# Altium PCB TCS34725_PCB.PcbDoc
Units mm, origin at the board's own origin, x right, y up, seen from the top; angles counter-clockwise.
Board outline 22.5 x 38.5 mm, 2 copper layers (Top Layer, Bottom Layer), stack 1.571 mm thick; 22 components, 12 nets, 59 pads, 9 vias.
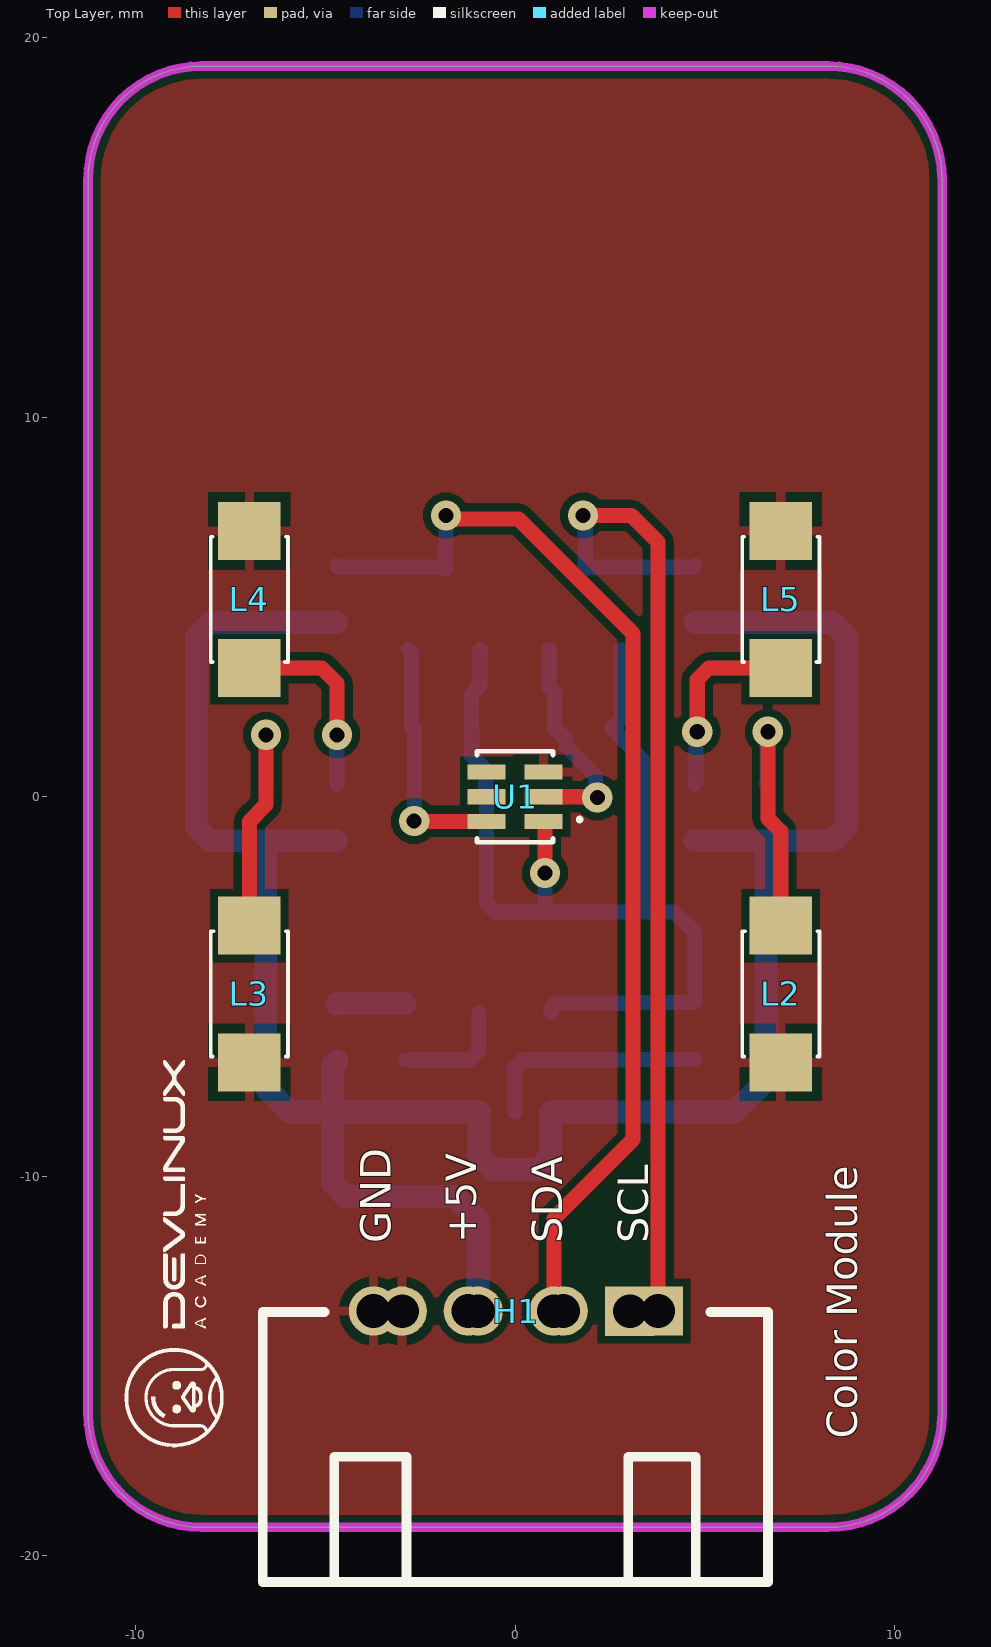
[diagram p0: Top Layer view]
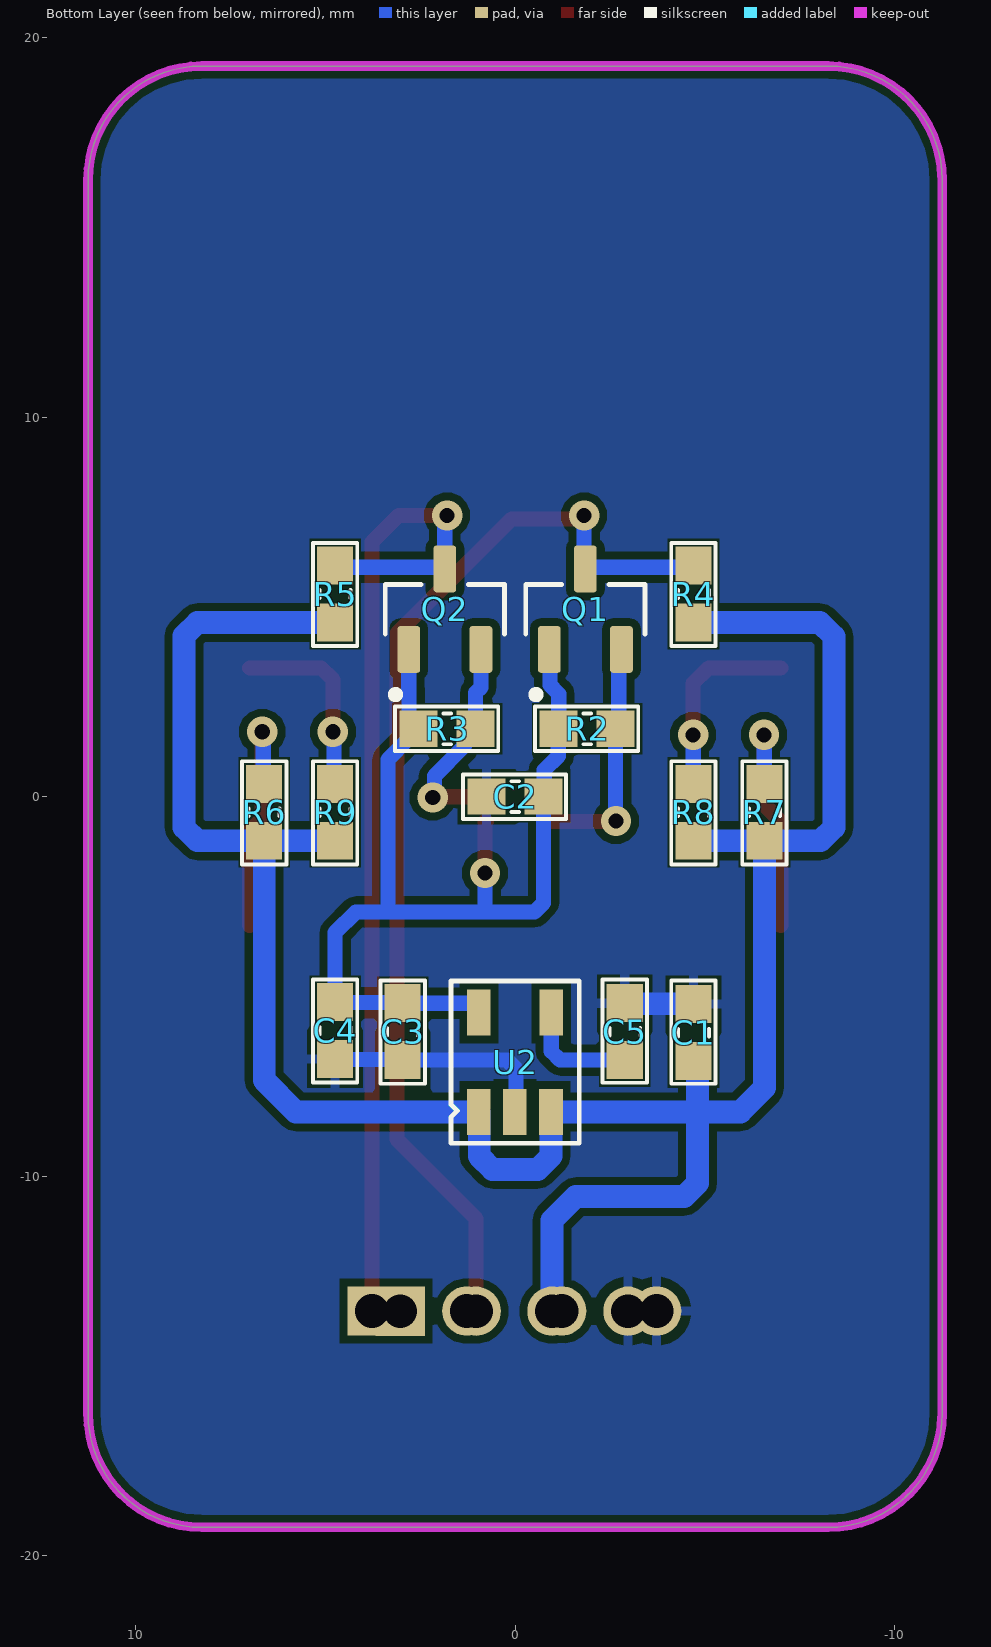
[diagram p1: Bottom Layer view, seen from below]
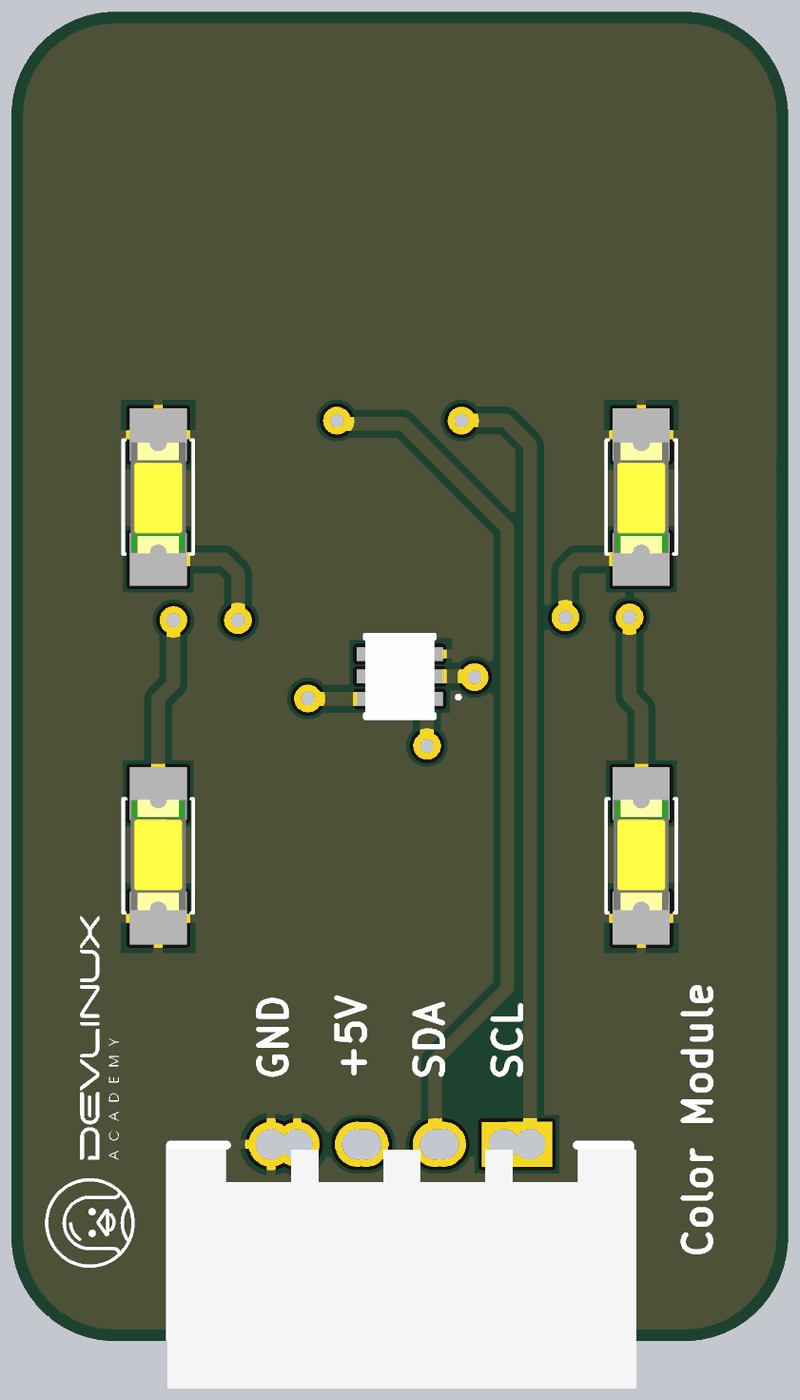
[diagram p2: 3D render of the assembled board from above, using the file's embedded part models]
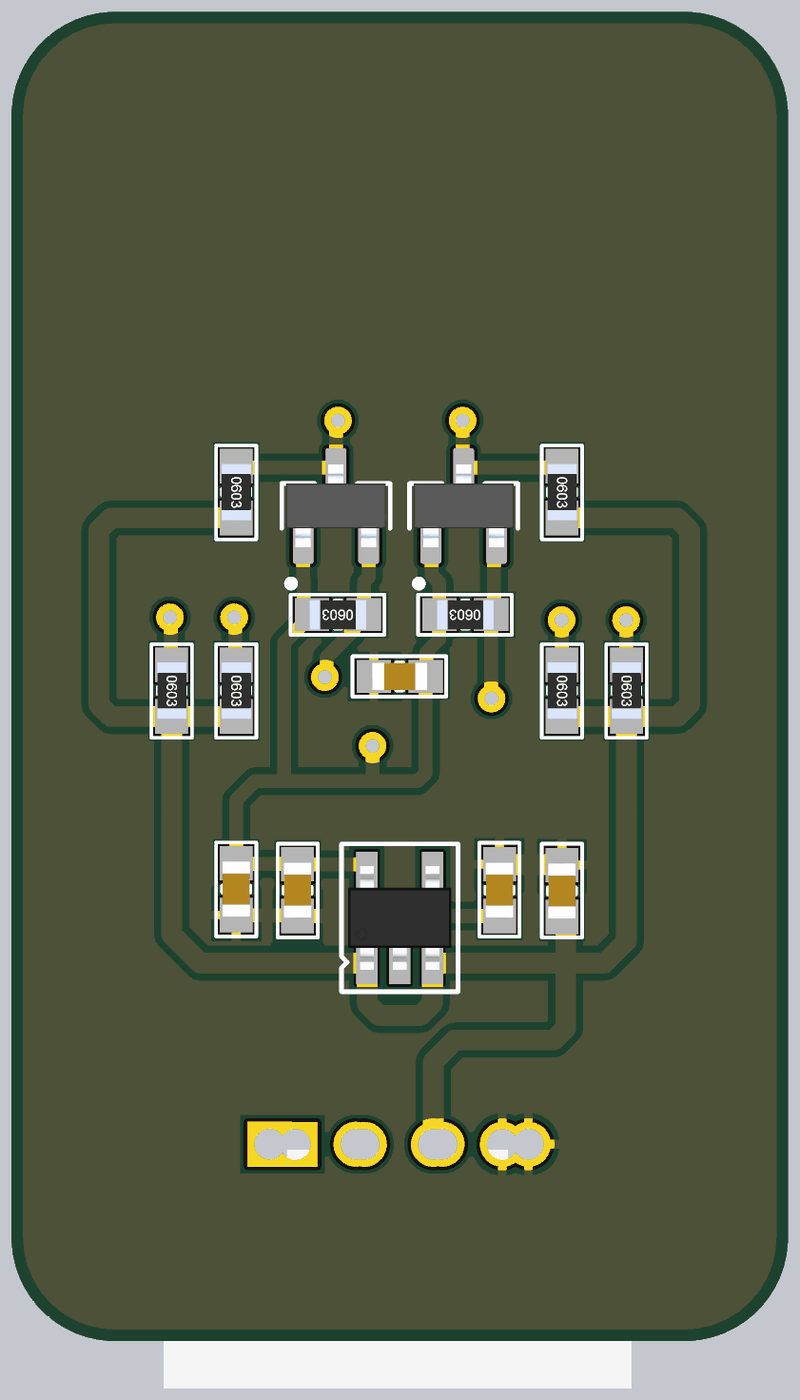
[diagram p3: 3D render of the assembled board from below, using the file's embedded part models]

## Layer stack, top to bottom
Top Solder: solder mask 0.0102, Solder Resist, Dk 3.5
Top Layer: signal copper 0.0356
Dielectric 1: dielectric 1.5, FR-4, Dk 4.8
Bottom Layer: signal copper 0.0356
Bottom Solder: solder mask 0.0102, Solder Resist, Dk 3.5

## Board outline
-11.25,-16.25 -11.25,16.25 cw(c-8.25,16.25) -8.25,19.25 8.25,19.25 cw(c8.25,16.25) 11.25,16.25 11.25,-16.25 cw(c8.25,-16.25) 8.25,-19.25 -8.25,-19.25 cw(c-8.25,-16.25)

## Design rules (kind name [scope] priority, off if disabled: settings)
Clearance [All] p1: gap=0.2 ignorepadtopadclearanceinfootprint=FALSE except(0: Arc-Hole Track-Hole SMDPad-Hole THPad-Hole Via-Hole Fill-Hole Poly-Hole Region-Hole Text-Hole)
PolygonConnect [All] p1: connectstyle=Relief reliefconductorwidth=0.254 reliefentries=4 polygonreliefangle="90 Angle" airgapwidth=0.254
RoomDefinition TCS37425_SCH [InComponentClass('TCS37425_SCH')] p1: confinementstyle=ConfineIn formatcopy=TRUE lockcomponents=FALSE outline -48.541,-51.758 62.965,-51.758 62.965,-35.248 -48.541,-35.248
RoutingVias [All] p1: holewidth=0.4 width=0.8 viastyle="Through Hole" minholewidth=0.3 minwidth=0.6 maxholewidth=0.5 maxwidth=1
SolderMaskExpansion [All] p1: expansion=0.102 istentingtop=FALSE
Width [All] p1: maxlimit=0.6 minlimit=0.254 preferedwidth=0.4
30 further rules are at their usual default settings.

## Components (designator, comment, footprint, x,y, rotation, side; value= is the part's Value field where it differs from the comment)
C1 "100nF" "tu 0603" -4.7,-6.215 r90 bottom
C2 "100nF" "tu 0603" 0,0 r0 bottom
C3 "10uF" "tu 0603" 2.96,-6.19 r270 bottom
C4 "100nF" "tu 0603" 4.74,-6.16 r270 bottom
C5 "22nF" "tu 0603" -2.89,-6.19 r90 bottom
H1 "Header 4P 2.54 + 2.0 Duc Cong" "Header 4P DC 2.54 + 2.0" 3.745,-13.575 r270 top
L2 "LED Trang 1206" LED-1206-Yellow 7,-3.393 r270 top
L3 "LED Trang 1206" LED-1206-Yellow -7,-3.393 r270 top
L4 "LED Trang 1206" LED-1206-Yellow -7,3.393 r90 top
L5 "LED Trang 1206" LED-1206-Yellow 7,3.393 r90 top
Q1 "BSS138" SOT95P240X111-3N -1.851,4.94 r90 bottom
Q2 "BSS138" SOT95P240X111-3N 1.85,4.94 r90 bottom
R2 "10k" "tro smd 0603" -1.9,1.79 r0 bottom
R3 "10k" "tro smd 0603" 1.79,1.79 r0 bottom
R4 "10k" "tro smd 0603" -4.7,5.34 r270 bottom
R5 "10k" "tro smd 0603" 4.74,5.34 r270 bottom
R6 "330R" "tro smd 0603" 6.61,-0.41 r270 bottom
R7 "330R" "tro smd 0603" -6.57,-0.41 r270 bottom
R8 "330R" "tro smd 0603" -4.7,-0.41 r270 bottom
R9 "330R" "tro smd 0603" 4.74,-0.41 r270 bottom
U1 "TCS34725" SON65P200X240X70-6N 0,0 r180 top
U2 "RT9193-33GB" SOT23-5 0,-6.994 r180 bottom

## Footprints (in the part's own frame and the unit in brackets; to place one, negate y for a bottom-side part, rotate by r counter-clockwise, add the part's x,y. Pads: shape width x height; smd on the part's side, far side on the other; paste and mask are expansions set on the pad)
"Header 4P DC 2.54 + 2.0" [mm]
  rect 1.3x1.3 hole 0.889: 1(-0.025,0.025) 1(-0.022,-0.719)
  round 1.3 hole 0.889: 2(-0.025,-2.475) 2(-0.022,-2.719) 3(-0.025,-4.975) 3(-0.022,-4.719) 4(-0.025,-7.475) 4(-0.022,-6.718)
  silkscreen extent 0,-10.39 7.11,2.92, body extent 0.13,-10.48 7.06,3.11, height 7.38
LED-1206-Yellow [mil]
  rect 60x65 smd: 1(0,0) 2(142,0)
  silkscreen extent 6,-40 136,40, body extent 7,-31 133,32, height 43
SON65P200X240X70-6N [mm]
  rect 1x0.4 smd: 1(-0.75,0.65) 2(-0.75,0) 3(-0.75,-0.65) 4(0.75,-0.65) 5(0.75,0) 6(0.75,0.65)
  silkscreen extent -1.75,-1.2 1,1.2, body extent -1,-1.2 1,1.2, height 0.65
SOT23-5 [mm] "CASE: SOT"
  rect 0.62x1.22 smd mask+0.076: 1(-0.953,-1.31) 2(-0.003,-1.31) 3(0.947,-1.31) 4(0.952,1.31) 5(-0.953,1.31)
  silkscreen extent -1.69,-2.14 1.69,2.14, body extent -1.5,-1.5 1.5,1.5, height 1.41
SOT95P240X111-3N [mm]
  rrect25% 1.23x0.6 smd: 1(-1.06,0.95) 2(-1.06,-0.95) 3(1.06,0)
  silkscreen extent -2.35,-1.57 0.65,1.57, body extent -1.2,-1.45 1.2,1.45, height 1.11
"tro smd 0603" [mm] "Chip Capacitor, 2-Leads, Body 1,60x0,80mm, IPC Medium Density"
  rect 1x0.95 smd mask+0.076: 1(-0.75,0) 2(0.75,0)
  silkscreen extent -1.35,-0.58 1.37,0.58, body extent -0.82,-0.42 0.82,0.43, height 0.44
"tu 0603" [mm] "Chip Capacitor, 2-Leads, Body 1,60x0,80mm, IPC Medium Density"
  rect 1x0.95 smd mask+0.076: 1(-0.75,0) 2(0.75,0)
  silkscreen extent -1.35,-0.58 1.37,0.58, body extent -0.8,-0.4 0.8,0.4, height 0.9

## Part data
C1 C2 C4 C5: library part "Tu 0603 104 50V 10%", "Dán", Chung_Loai=Dán, Don_Vi=Con, Ma_Hang=MH004568, So_Chan=2, Ten_Linh_Kien="Tụ 0603 104-100nF 10% 50V"
C3: library part "Tu 0603 106 16V 20%", "Dán", Chung_Loai=Dán, Don_Vi=Con, Ma_Hang=MH004848, So_Chan=2, Ten_Linh_Kien="Tụ 0603-10uF 20% 16V"
H1: "Cắm", Chung_Loai=Cắm, Don_Vi=Con, Ma_Hang=MH001310, Ten_Linh_Kien="Header 4P XH2.54-4P Đực Cong"
L2 L3 L4 L5: library part "LED 1206 Trang", "Dán", Chung_Loai=Dán, Don_Vi=Con, Ma_Hang=MH002332, Ten_Linh_Kien="LED1206 Màu Trắng (White)"
Q1 Q2: "N-Channel 50 V 220mA (Ta) 350mW (Ta) Surface Mount SOT-23-3", Package="SOT-23-3 ON Semiconductor", Check_prices=https://www.snapeda.com/parts/BSS138/Onsemi/view-part/?ref=eda, MF=onsemi, MP=BSS138, SnapEDA_Link=https://www.snapeda.com/parts/BSS138/Onsemi/view-part/?ref=snap
R2 R3 R4 R5: library part "Tro 0603 1% 10k", "Dán", Chung_Loai=Dán, Don_Vi=Con, Ma_Hang=MH006333, So_Chan=2, Ten_Linh_Kien="Trở 0603 1% 10k"
R6 R7 R8 R9: library part "Tro 0603 5% 330R", "Dán", Chung_Loai=Dán, Don_Vi=Con, Ma_Hang=MH006910, So_Chan=2, Ten_Linh_Kien="Trở 0603 5% 330R"
U1: Package="SMD-6 ams", Availability="In Stock", Check_prices=https://www.snapeda.com/parts/TCS34725FN/ams/view-part/?ref=eda, MF=ams, MP=TCS34725FN, Price=None, Purchase-URL=https://pricing.snapeda.com/search/part/TCS34725FN/?ref=eda, SnapEDA_Link=https://www.snapeda.com/parts/TCS34725FN/ams/view-part/?ref=snap
U2: library part REG_5.5V-3.3V-0.3A-1W-SOT-23-5, "Linear Voltage Regulator IC 1 Output 300mA SOT-23-5", Alternate Part Number-1=NA, Case/Package=SOT-23-5, Manufacturer="Richtek USA Inc.", Supplier Part Number-1=C15651, Manufacturer Part Number=RT9193-33GB, Supplier-1=LCSC

## Via types
v1: diameter 0.8, hole 0.4, Top Layer to Bottom Layer, 9 vias

## Nets (pads, with @x,y where several pads share a name; then routed paths per layer and width w, separated by ;. In a path a pad name is that pad's centre, name@x,y a point inside that pad or via, vN(x,y) a via of type N, cw(c..) or ccw(c..) an arc to the next point about the centre after c; other vN are vias at no path point)
+3V3: C2.1 C3.1 C4.1 Q1.1 Q2.1 R2.2 R3.2 U1.1 U2.5 | length 28.4
  Top Layer w0.4: U1.1 0.79,-0.65 v1(0.79,-2.01)
  Bottom Layer w0.4: Q1.1 -0.92,3.861 -0.92,2.94 -1.15,2.71 R2.2 -1.14,1.78 -1.14,1.07 -0.77,0.7 -0.77,0.02 C2.1 -0.75,-2.801 -0.516,-3.035 0.79,-3.035 ; v1(0.79,-2.01) 0.79,-3.035 ; U2.5 0.953,-5.55 1.063,-5.44 C3.1 2.975,-5.425 4.725,-5.425 C4.1 4.74,-3.58 4.195,-3.035 3.35,-3.035 ; Q2.1 2.8,2.87 2.79,2.86 2.79,2.04 R3.2 2.565,1.79 2.84,1.515 2.84,1.49 3.35,0.98 3.35,-3.035 ; 0.79,-3.035 3.35,-3.035
+5: C1.1 H1.3 R4.2 R5.2 R6.2 R7.2 R8.2 R9.2 U2.1 U2.3 | length 65.1
  Bottom Layer w0.6: C1.1 -4.81,-7.075 -4.81,-8.304 ; R8.2 R7.2 ; R4.2 -8.03,4.59 -8.4,4.22 -8.4,-0.809 -8.049,-1.16 R7.2 ; H1.3@-0.974,-13.553 -0.974,-11.156 -1.6,-10.53 -4.459,-10.53 -4.81,-10.179 -4.81,-8.304 ; R9.2 R6.2 ; R5.2 8.369,4.59 8.72,4.239 8.72,-0.809 8.369,-1.16 R6.2 ; R7.2 -6.57,-7.67 -5.936,-8.304 -4.81,-8.304 ; -4.81,-8.304 U2.3 -0.947,-9.469 -0.596,-9.82 0.591,-9.82 0.943,-9.469 0.943,-8.314 U2.1 5.776,-8.304 6.61,-7.47 R6.2
GND: C1.2 C2.2 C3.2 C4.2 C5.2 H1.4 L2.2 L3.2 L4.2 L5.2 U1.3 U2.2 | length 7.8
  Bottom Layer w0.4: U2.2 -0.024,-8.278 -0.024,-7.174 0.211,-6.94 C3.2 2.975,-6.925 4.725,-6.925 C4.2
  Bottom Layer w0.6: C1.2 -4.687,-5.453 -2.903,-5.453 C5.2
NetC5_1: C5.1 U2.4 | length 3.1
  Bottom Layer w0.4: C5.1 -1.187,-6.94 -0.952,-6.706 U2.4
NetL2_1: L2.1 R6.1 | length 6.6
  Top Layer w0.4: v1@6.66,1.7 6.66,-0.57 7,-0.91 L2.1
  Bottom Layer w0.4: R6.1 6.635,0.365 6.635,1.675 v1@6.66,1.7
  other v1: 6.66,1.71
NetL3_1: L3.1 R7.1 | length 6.5
  Top Layer w0.4: L3.1 -7,-0.65 -6.56,-0.21 v1(-6.56,1.63)
  Bottom Layer w0.4: R7.1 -6.565,0.345 -6.565,1.625 v1(-6.56,1.63)
NetL4_1: L4.1 R8.1 | length 5.1
  Top Layer w0.4: L4.1 -5.093,3.393 -4.69,2.99 v1@-4.69,1.61
  Bottom Layer w0.4: R8.1 -4.695,0.345 -4.695,1.605 v1@-4.69,1.61
  other v1: -4.69,1.63
NetL5_1: L5.1 R9.1 | length 5.1
  Top Layer w0.4: v1(4.8,1.71) 4.8,3.089 5.104,3.393 L5.1
  Bottom Layer w0.4: R9.1 4.77,0.37 4.77,1.68 v1(4.8,1.71)
SCL_3V3: Q2.2 R3.1 U1.2 | length 5.9
  Top Layer w0.254: U1.2 U1.2@0.755,-0.005
  Top Layer w0.4: U1.2@0.755,0 2.15,0 v1(2.17,-0.02)
  Bottom Layer w0.4: Q2.2 0.9,2.88 1.04,2.74 R3.1 1.065,1.79 1.34,1.515 1.34,1.33 2.123,0.547 2.123,0.027 v1(2.17,-0.02)
SCL_5V: H1.1 Q2.3 R5.1 | length 26.9
  Top Layer w0.4: v1(1.79,7.41) 3.07,7.41 3.77,6.71 H1.1@3.77,-13.55
  Bottom Layer w0.4: v1(1.79,7.41) 1.85,7.35 Q2.3 1.895,6.045 4.695,6.045 R5.1
SDA_3V3: Q1.2 R2.1 U1.6 | length 6.5
  Top Layer w0.4: v1(-2.66,-0.64) -2.65,-0.65 U1.6
  Bottom Layer w0.4: Q1.2 -2.73,3.808 -2.73,1.87 R2.1 -2.65,-0.63 v1(-2.66,-0.64)
SDA_5V: H1.2 Q1.3 R4.1 | length 29.2
  Top Layer w0.4: v1@-1.82,7.37 -1.77,7.32 0.09,7.32 3.11,4.3 3.11,-9.03 1.026,-11.114 H1.2@1.026,-13.553
  Bottom Layer w0.4: R4.1 -4.655,6.045 -1.896,6.045 Q1.3 -1.82,6.032 v1(-1.82,7.41)
pads on no net: U1.4 U1.5

## Polygon pours and split planes (outlines as drawn)
GND on Bottom Layer "NONET_L-01_P-001" (solid, remove dead copper, pour order 0): -12.15,20.79 -11.09,19.73 12.28,19.73 12.28,-20.64 11.61,-21.31 11.48,-21.18 -12.86,-21.18
GND on Top Layer "NONET_L-01_P-001" (solid, remove dead copper, pour order 1): -12.46,20.08 12.59,20.08 12.68,19.99 11.97,19.28 11.97,-21 -12.46,-21 -13.04,-20.42

## Keep-outs
Keep-Out Layer:
  the board outline again, w0.254

## Silkscreen, mask and mechanical layers (free items; w line width, h text height)
Top Overlay:
  drawing of 21 lines, arcs and shapes, not listed
  text "GND" at -3.28,-11.77 h0.8 r90
  text "+5V" at -1.017,-11.77 h0.8 r90
  text "SDA" at 1.247,-11.77 h0.8 r90
  text "SCL" at 3.51,-11.77 h0.8 r90
  text "Color Module" at 9.02,-16.92 h0.8 r90